# Altium PCB SSOP-TSSOP8.PcbDoc
Units mil, origin at the board's own origin, x right, y up, seen from the top; angles counter-clockwise.
Board outline 700 x 400 mil, 2 copper layers (Top Layer, Bottom Layer); 3 components, 8 nets, 16 pads, 0 vias.
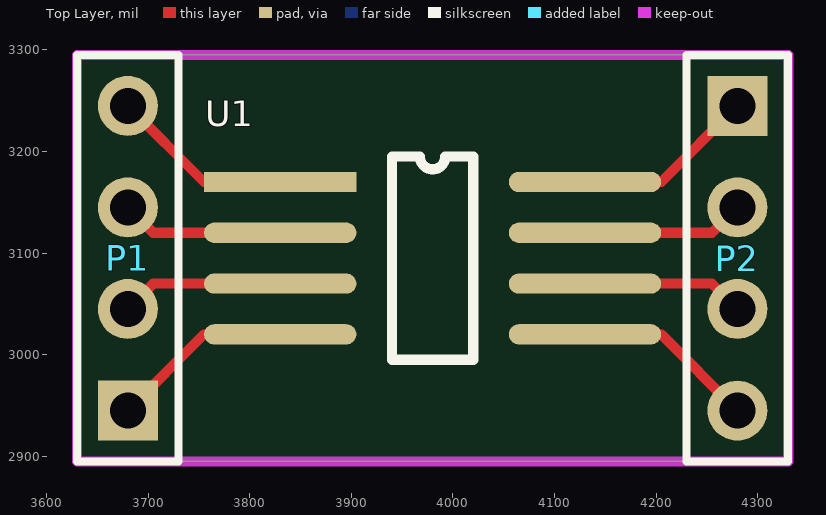
[diagram p0: Top Layer view]
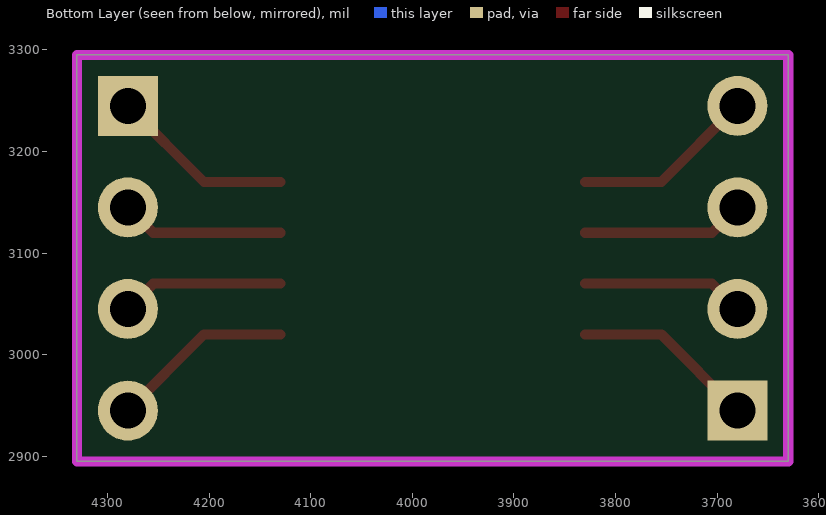
[diagram p1: Bottom Layer view, seen from below]

## Layer stack, top to bottom
Top Solder: solder mask 0.4, Solder Resist, Dk 3.5
Top Layer: signal copper 1.4
Dielectric 1: dielectric 12.6, FR-4, Dk 4.8
Bottom Layer: signal copper 1.4
Bottom Solder: solder mask 0.4, Solder Resist, Dk 3.5

## Board outline
3630,2895 4330,2895 4330,3295 3630,3295

## Design rules (kind name [scope] priority, off if disabled: settings)
Clearance [All] p1: gap=10 ignorepadtopadclearanceinfootprint=FALSE except(0: Arc-Hole Track-Hole SMDPad-Hole THPad-Hole Via-Hole Fill-Hole Poly-Hole Region-Hole Text-Hole)
PolygonConnect [All] p1: connectstyle=Relief reliefconductorwidth=10 reliefentries=4 polygonreliefangle="90 Angle" airgapwidth=10
RoutingVias [All] p1: holewidth=28 width=50 viastyle="Through Hole" minholewidth=28 minwidth=50 maxholewidth=28 maxwidth=50
SolderMaskExpansion [All] p1: expansion=4
Width [All] p1: maxlimit=10 minlimit=10 preferedwidth=10
30 further rules are at their usual default settings.

## Components (designator, comment, footprint, x,y, rotation, side; value= is the part's Value field where it differs from the comment)
P1 "Header 4" HDR1X4 3680,2945 r90 top
P2 "Header 4" HDR1X4 4280,3245 r270 top
U1 "SOIC_8" SOIC8 3830,3170 r0 top

## Footprints (in the part's own frame and the unit in brackets; to place one, negate y for a bottom-side part, rotate by r counter-clockwise, add the part's x,y. Pads: shape width x height; smd on the part's side, far side on the other; paste and mask are expansions set on the pad)
HDR1X4 [mm] "Connector; Header; 4 Position"
  rect 1.5x1.5 hole 0.9: 1(0,0)
  round 1.5 hole 0.9: 2(2.54,0) 3(5.08,0) 4(7.62,0)
  silkscreen extent -1.27,-1.27 8.89,1.27
SOIC8 [mil]
  rect 150x20 smd: 1(0,0)
  oval 150x20 smd: 2(0,-50) 3(0,-100) 4(0,-150) 5(300,-150) 6(300,-100) 7(300,-50) 8(300,0)
  silkscreen extent 110,-175 190,25

## Part data
P1 P2: "Header, 4-Pin", LatestRevisionDate=17-Jul-2002, LatestRevisionNote="Re-released for DXP Platform.", Publisher="Altium Limited"

## Nets (pads, with @x,y where several pads share a name; then routed paths per layer and width w, separated by ;. In a path a pad name is that pad's centre, name@x,y a point inside that pad or via, vN(x,y) a via of type N, cw(c..) or ccw(c..) an arc to the next point about the centre after c; other vN are vias at no path point)
NetP1_1: P1.1 U1.4 | length 181.1
  Top Layer w10: P1.1 3755,3020 U1.4
NetP1_2: P1.2 U1.3 | length 160.4
  Top Layer w10: P1.2 3705,3070 U1.3
NetP1_3: P1.3 U1.2 | length 160.4
  Top Layer w10: P1.3 3705,3120 U1.2
NetP1_4: P1.4 U1.1 | length 181.1
  Top Layer w10: P1.4 3755,3170 U1.1
NetP2_1: P2.1 U1.8 | length 181.1
  Top Layer w10: U1.8 4205,3170 P2.1
NetP2_2: P2.2 U1.7 | length 160.4
  Top Layer w10: U1.7 4255,3120 P2.2
NetP2_3: P2.3 U1.6 | length 160.4
  Top Layer w10: U1.6 4255,3070 P2.3
NetP2_4: P2.4 U1.5 | length 181.1
  Top Layer w10: U1.5 4205,3020 P2.4

## Keep-outs
Keep-Out Layer:
  the board outline again, w10